# EAGLE board Xonik Waveshaper v1.0 w gp panelized (EAGLE 6.5.0), part 1 of 2
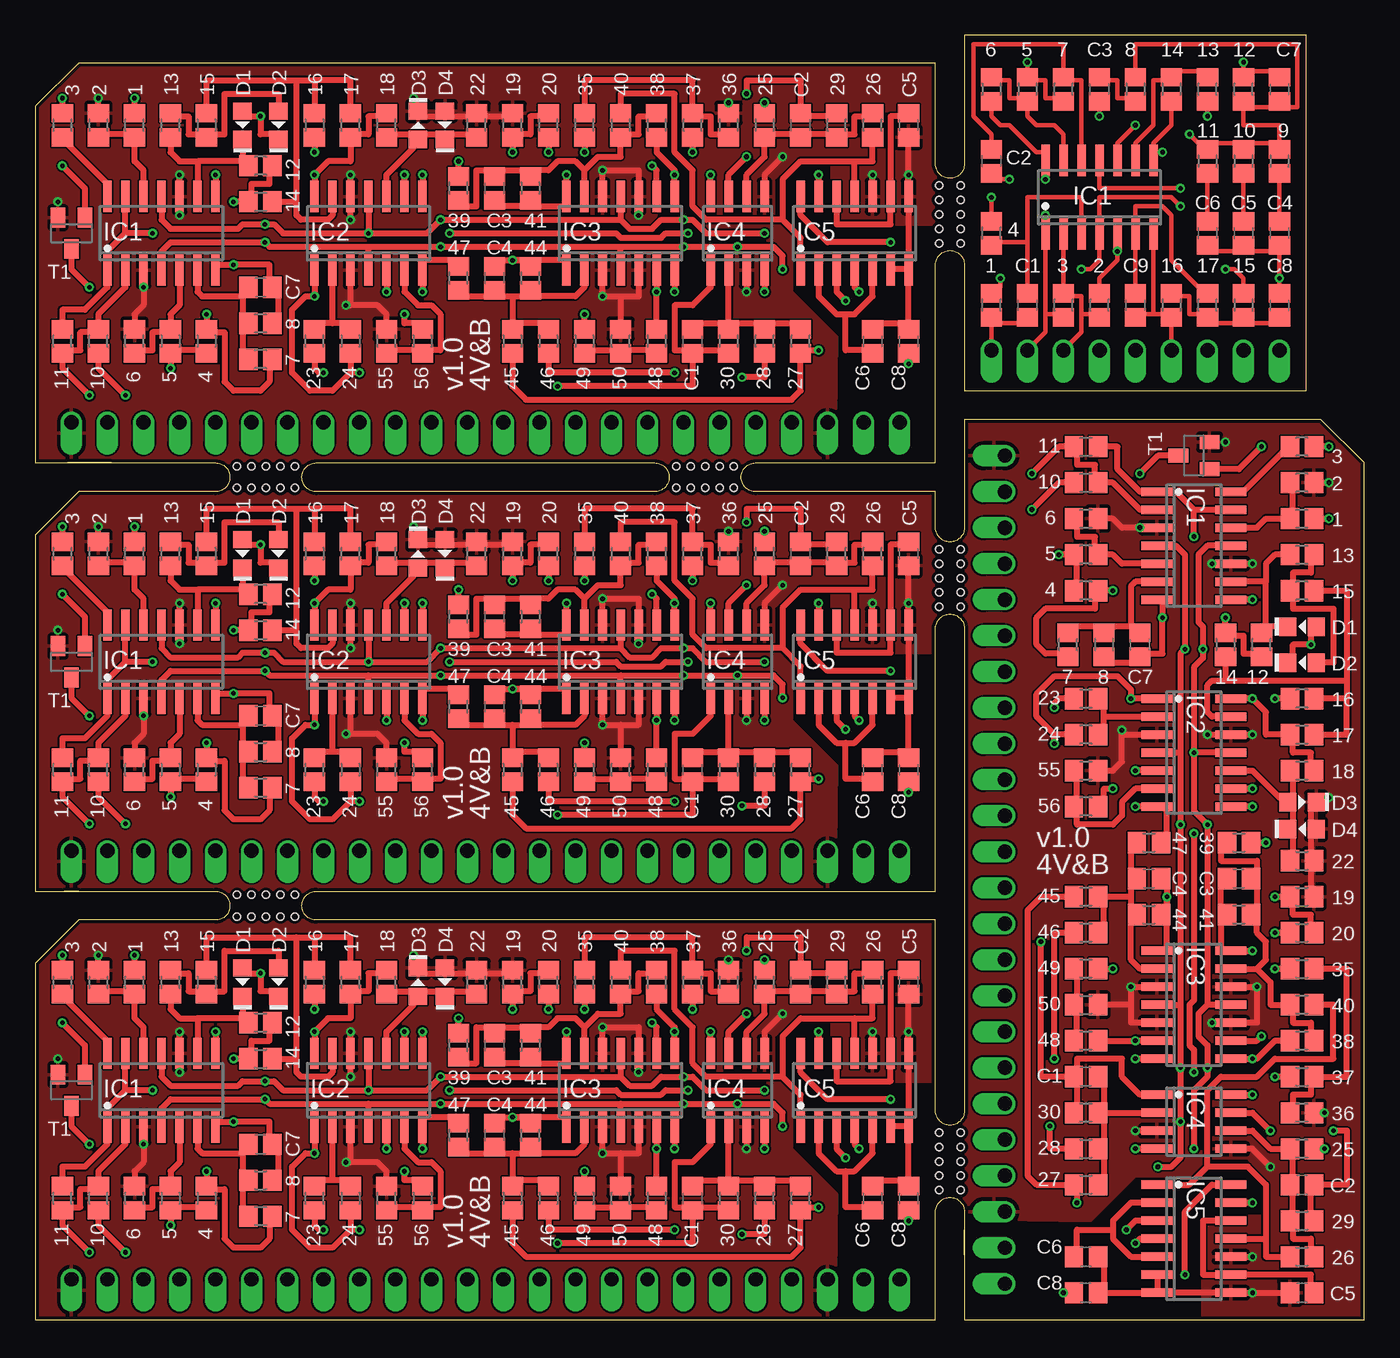
[diagram p0: board, top side]
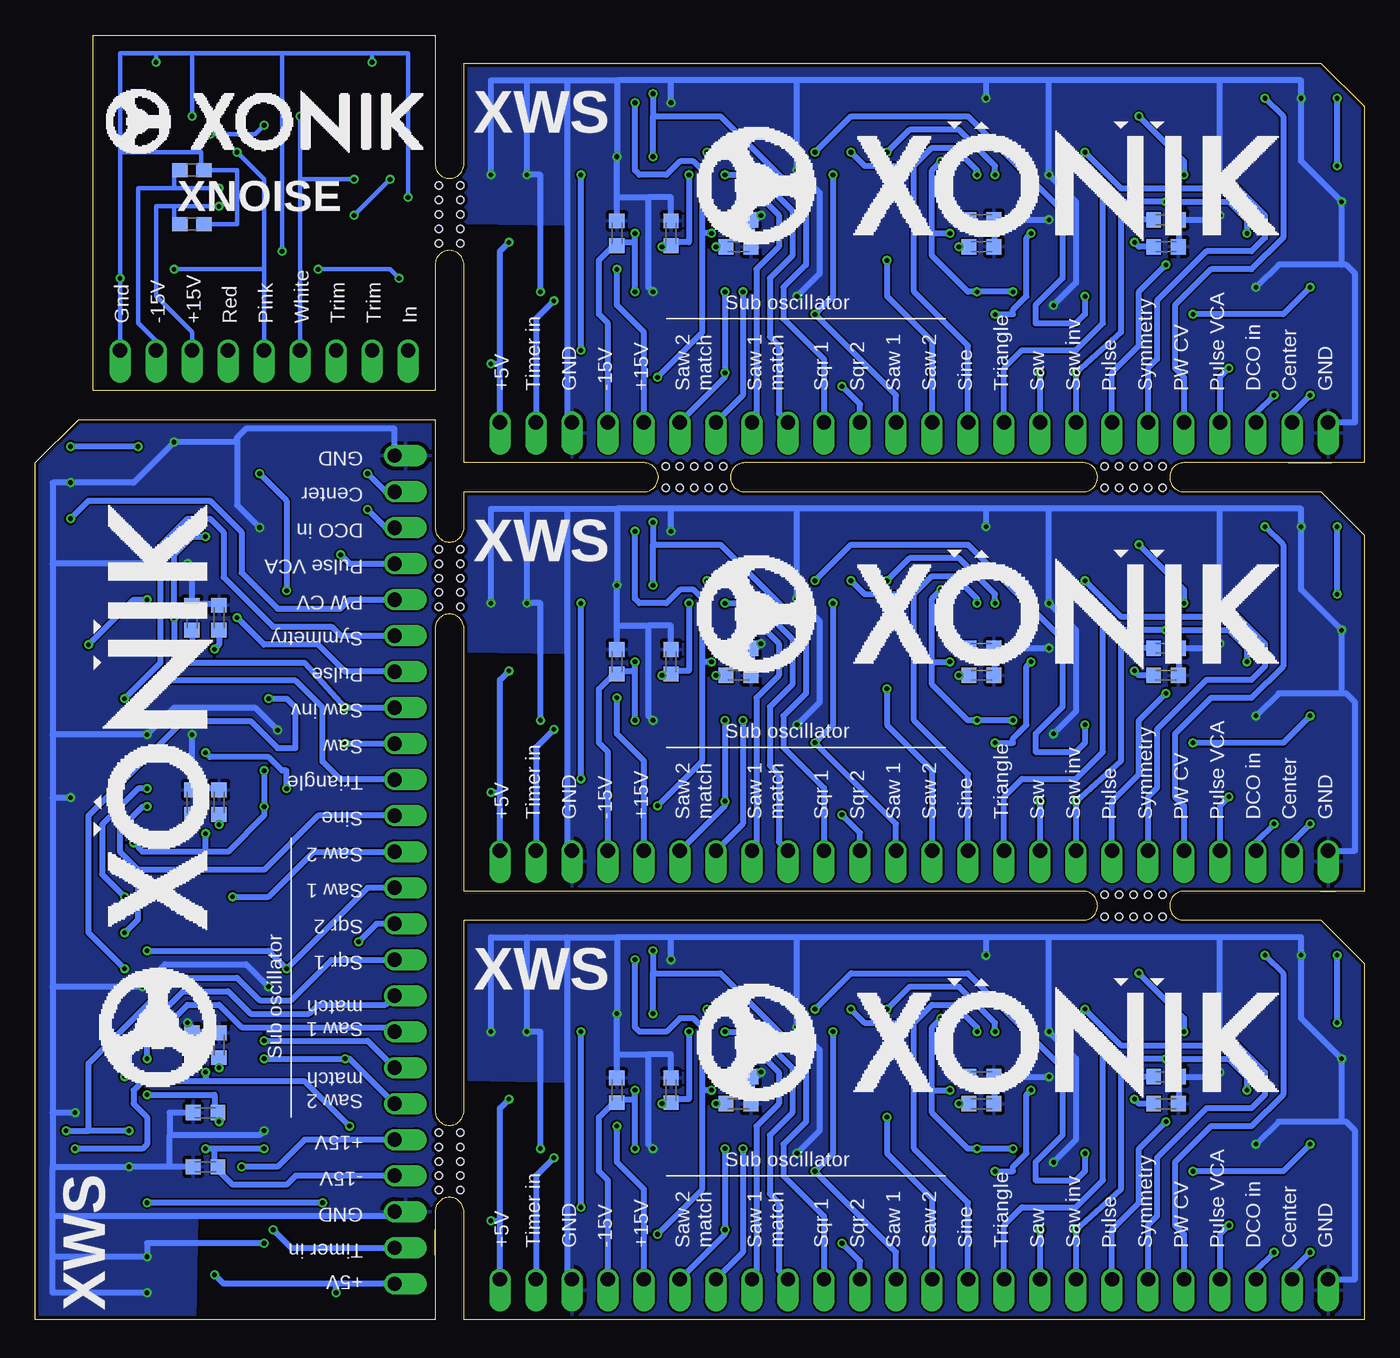
[diagram p1: board, bottom side, seen from below]

Size 93.73 x 90.6 mm. Coordinates in mm from the lower left corner, seen from the top.
Outline: 3.05,30.23 2.03,30.23
Outline: 5.33,60.45 2.29,60.45
Outline: 65.53,4.57 65.53,6.35
Outline: 0,0 63.5,0 63.5,7.62 arc-180 65.53,7.62 65.53,0 93.73,0 93.73,60.45 90.68,63.5 65.53,63.5 65.53,55.88 arc-180 63.5,55.88 63.5,58.42 50.8,58.42 arc-180 50.8,60.45 63.5,60.45 63.5,74.42 arc-180 65.53,74.42 65.53,65.53 89.64,65.53 89.64,90.6 65.53,90.6 65.53,81.53 arc-180 63.5,81.53 63.5,88.65 3.05,88.65 0,85.6 0,60.45 12.7,60.45 arc-180 12.7,58.42 3.05,58.42 0,55.37 0,30.23 12.7,30.23 arc-180 12.7,28.19 3.05,28.19 0,25.15 0,0
Outline: 63.5,14.73 63.5,28.19 19.81,28.19 arc-180 19.81,30.23 63.5,30.23 63.5,48.77 arc-180 65.53,48.77 65.53,14.73 arc-180 63.5,14.73
Outline: 43.69,58.42 19.81,58.42 arc-180 19.81,60.45 43.69,60.45 arc-180 43.69,58.42
Copper layers (1*16): Top 0.035mm / dielectric 1.5mm / Bottom 0.035mm
Design rules "dirt_cheap_dirty_boards.v1": minimum track width 5mil, minimum drill 12mil, track to track 5mil, track to pad 5mil, pad to pad 5mil, via to via 5mil, smd to smd 0mil, copper to edge 10mil, drill to drill 10mil, minimum pad ring 10mil, minimum via ring 6mil, stop-mask expansion 2mil, vias tented up to drill 25mil, thermal gap 10mil
Holes 0.5 mm at 14.22,60.2 15.24,60.2 16.26,60.2 17.27,60.2 18.29,60.2 18.29,58.67 17.27,58.67 16.26,58.67 15.24,58.67 14.22,58.67 45.21,60.2 46.23,60.2 47.24,60.2 48.26,60.2 49.28,60.2 49.28,58.67 48.26,58.67 47.24,58.67 46.23,58.67 45.21,58.67 63.75,50.29 63.75,51.31 63.75,52.32 63.75,53.34 63.75,54.36 65.28,54.36 65.28,53.34 65.28,52.32 65.28,51.31 65.28,50.29 14.22,29.97 15.24,29.97 16.26,29.97 17.27,29.97 18.29,29.97 18.29,28.45 17.27,28.45 16.26,28.45 15.24,28.45 14.22,28.45 63.75,9.14 63.75,10.16 63.75,11.18 63.75,12.19 63.75,13.21 65.28,13.21 65.28,12.19 65.28,11.18 65.28,10.16 65.28,9.14 63.75,75.95 63.75,76.96 63.75,77.98 63.75,78.99 63.75,80.01 65.28,80.01 65.28,78.99 65.28,77.98 65.28,76.96 65.28,75.95

## Footprints (pad centres in the part's own frame; a part is rotated, then mirrored left to right if it is on the bottom)
R0805 = smd 1.3 x 1.5: 1 -0.85,0; 2 0.85,0
SIP-PIN01-1J = drill 1.016 offset: 1 0,0
C0805 = smd 1.3 x 1.5: 1 -0.85,0; 2 0.85,0
C0603K = smd 1.05 x 1.08: 1 -0.875,0; 2 0.875,0
C0603 = smd 1.1 x 1: 1 -0.85,0; 2 0.85,0
D0805-J = smd 1.2 x 1.3: A -1,0; C 1,0
SO14 = smd 0.6 x 2.2: 1 -3.81,-2.6; 2 -2.54,-2.6; 3 -1.27,-2.6; 4 0,-2.6; 5 1.27,-2.6; 6 2.54,-2.6; 7 3.81,-2.6; 8 3.81,2.6; 9 2.54,2.6; 10 1.27,2.6; 11 0,2.6; 12 -1.27,2.6; 13 -2.54,2.6; 14 -3.81,2.6
SO08J = smd 0.6 x 2.2: 1 -1.905,-2.6; 2 -0.635,-2.6; 3 0.635,-2.6; 4 1.905,-2.6; 5 1.905,2.6; 6 0.635,2.6; 7 -0.635,2.6; 8 -1.905,2.6
SO14J = smd 0.6 x 2.2: 1 -3.81,-2.6; 2 -2.54,-2.6; 3 -1.27,-2.6; 4 0,-2.6; 5 1.27,-2.6; 6 2.54,-2.6; 7 3.81,-2.6; 8 3.81,2.6; 9 2.54,2.6; 10 1.27,2.6; 11 0,2.6; 12 -1.27,2.6; 13 -2.54,2.6; 14 -3.81,2.6
SOT23-BEC = smd 1 x 1.4: B -0.95,-1.1; C 0,1.1; E 0.95,-1.1

## Placement (x,y rotation side)
1  10k  [R0805]  6.99,23.81 90 top
2  82k  [R0805]  4.45,23.81 270 top
3  68k  [R0805]  1.91,23.81 270 top
4  1k  [R0805]  12.06,8.57 270 top
5  20k  [R0805]  9.53,8.57 270 top
6  10k  [R0805]  6.99,8.57 90 top
7  10k  [R0805]  15.88,7.3 180 top
8  20k  [R0805]  15.88,9.84 0 top
9  10k  [R0805]  6.99,54.04 90 top
10  27k  [R0805]  4.45,8.57 90 top
11  27k  [R0805]  1.91,8.57 90 top
12  100k  [R0805]  15.88,20.95 180 top
13  100k  [R0805]  9.53,23.81 90 top
14  100k  [R0805]  15.88,18.41 0 top
15  50k  [R0805]  12.06,23.81 270 top
16  150k  [R0805]  19.68,23.81 270 top
17  200k  [R0805]  22.23,23.81 90 top
18  150k  [R0805]  24.77,23.81 90 top
19  1k5  [R0805]  33.66,23.81 90 top
20  15k  [R0805]  36.2,23.81 90 top
21  82k  [R0805]  4.45,54.04 270 top
22  22k  [R0805]  31.11,23.81 90 top
23  100k  [R0805]  19.68,8.57 90 top
24  100k  [R0805]  22.23,8.57 270 top
25  10k  [R0805]  51.44,23.81 270 top
26  10k  [R0805]  59.05,23.81 90 top
27  10k  [R0805]  53.98,8.57 90 top
28  10k  [R0805]  51.44,8.57 90 top
29  20k  [R0805]  56.52,23.81 90 top
30  20k  [R0805]  48.9,8.57 270 top
31  68k  [R0805]  1.91,54.04 270 top
32  1k  [R0805]  12.06,38.8 270 top
33  20k  [R0805]  9.53,38.8 270 top
34  10k  [R0805]  6.99,38.8 90 top
35  27k  [R0805]  38.73,23.81 90 top
36  27k  [R0805]  48.9,23.81 270 top
37  27k  [R0805]  46.35,23.81 90 top
38  47k  [R0805]  43.81,23.81 270 top
39  47k  [R0805]  29.84,19.37 90 top
40  47k  [R0805]  41.27,23.81 270 top
41  47k  [R0805]  34.92,19.37 270 top
42  10k  [R0805]  15.88,37.53 180 top
43  20k  [R0805]  15.88,40.07 0 top
44  47k  [R0805]  34.92,13.02 90 top
45  47k  [R0805]  33.66,8.57 270 top
46  47k  [R0805]  36.2,8.57 270 top
47  47k  [R0805]  29.84,13.02 90 top
48  27k  [R0805]  43.81,8.57 270 top
49  27k  [R0805]  38.73,8.57 270 top
50  27k  [R0805]  41.27,8.57 90 top
51  27k  [R0805]  4.45,38.8 90 top
52  27k  [R0805]  1.91,38.8 90 top
53  100k  [R0805]  15.88,51.18 180 top
54  100k  [R0805]  9.53,54.04 90 top
55  20k  [R0805]  24.77,8.57 90 top
56  100k  [R0805]  27.3,8.57 270 top
57  100k  [R0805]  15.88,48.64 0 top
58  50k  [R0805]  12.06,54.04 270 top
59  150k  [R0805]  19.68,54.04 270 top
60  200k  [R0805]  22.23,54.04 90 top
61  150k  [R0805]  24.77,54.04 90 top
62  1k5  [R0805]  33.66,54.04 90 top
63  15k  [R0805]  36.2,54.04 90 top
64  22k  [R0805]  31.11,54.04 90 top
65  100k  [R0805]  19.68,38.8 90 top
66  100k  [R0805]  22.23,38.8 270 top
67  10k  [R0805]  51.44,54.04 270 top
68  10k  [R0805]  59.05,54.04 90 top
69  10k  [R0805]  53.98,38.8 90 top
70  10k  [R0805]  51.44,38.8 90 top
71  20k  [R0805]  56.52,54.04 90 top
72  20k  [R0805]  48.9,38.8 270 top
73  27k  [R0805]  38.73,54.04 90 top
74  27k  [R0805]  48.9,54.04 270 top
75  27k  [R0805]  46.35,54.04 90 top
76  47k  [R0805]  43.81,54.04 270 top
77  47k  [R0805]  29.84,49.59 90 top
78  47k  [R0805]  41.27,54.04 270 top
79  47k  [R0805]  34.92,49.59 270 top
80  47k  [R0805]  34.92,43.24 90 top
81  47k  [R0805]  33.66,38.8 270 top
82  47k  [R0805]  36.2,38.8 270 top
83  47k  [R0805]  29.84,43.24 90 top
84  27k  [R0805]  43.81,38.8 270 top
85  27k  [R0805]  38.73,38.8 270 top
86  27k  [R0805]  41.27,38.8 90 top
87  20k  [R0805]  24.77,38.8 90 top
88  100k  [R0805]  27.3,38.8 270 top
89  10k  [R0805]  6.99,84.26 90 top
90  82k  [R0805]  4.45,84.26 270 top
91  68k  [R0805]  1.91,84.26 270 top
92  1k  [R0805]  12.06,69.02 270 top
93  20k  [R0805]  9.53,69.02 270 top
94  10k  [R0805]  6.99,69.02 90 top
95  10k  [R0805]  15.88,67.75 180 top
96  20k  [R0805]  15.88,70.29 0 top
97  27k  [R0805]  4.45,69.02 90 top
98  27k  [R0805]  1.91,69.02 90 top
99  100k  [R0805]  15.88,81.41 180 top
100  100k  [R0805]  9.53,84.26 90 top
101  100k  [R0805]  15.88,78.87 0 top
102  50k  [R0805]  12.06,84.26 270 top
103  150k  [R0805]  19.68,84.26 270 top
104  200k  [R0805]  22.23,84.26 90 top
105  150k  [R0805]  24.77,84.26 90 top
106  1k5  [R0805]  33.66,84.26 90 top
107  15k  [R0805]  36.2,84.26 90 top
108  22k  [R0805]  31.11,84.26 90 top
109  100k  [R0805]  19.68,69.02 90 top
110  100k  [R0805]  22.23,69.02 270 top
111  10k  [R0805]  51.44,84.26 270 top
112  10k  [R0805]  59.05,84.26 90 top
113  10k  [R0805]  53.98,69.02 90 top
114  10k  [R0805]  51.44,69.02 90 top
115  20k  [R0805]  56.52,84.26 90 top
116  20k  [R0805]  48.9,69.02 270 top
117  27k  [R0805]  38.73,84.26 90 top
118  27k  [R0805]  48.9,84.26 270 top
119  27k  [R0805]  46.35,84.26 90 top
120  47k  [R0805]  43.81,84.26 270 top
121  47k  [R0805]  29.84,79.82 90 top
122  47k  [R0805]  41.27,84.26 270 top
123  47k  [R0805]  34.92,79.82 270 top
124  47k  [R0805]  34.92,73.47 90 top
125  47k  [R0805]  33.66,69.02 270 top
126  47k  [R0805]  36.2,69.02 270 top
127  47k  [R0805]  29.84,73.47 90 top
128  27k  [R0805]  43.81,69.02 270 top
129  27k  [R0805]  38.73,69.02 270 top
130  27k  [R0805]  41.27,69.02 90 top
131  20k  [R0805]  24.77,69.02 90 top
132  100k  [R0805]  27.3,69.02 270 top
133  10k  [R0805]  89.34,56.52 0 top
134  82k  [R0805]  89.34,59.05 180 top
135  68k  [R0805]  89.34,61.59 180 top
136  1k  [R0805]  74.1,51.44 180 top
137  20k  [R0805]  74.1,53.98 180 top
138  10k  [R0805]  74.1,56.52 0 top
139  10k  [R0805]  72.83,47.62 90 top
140  20k  [R0805]  75.37,47.62 270 top
141  27k  [R0805]  74.1,59.05 0 top
142  27k  [R0805]  74.1,61.59 0 top
143  100k  [R0805]  86.49,47.62 90 top
144  100k  [R0805]  89.34,53.98 0 top
145  100k  [R0805]  83.95,47.62 270 top
146  50k  [R0805]  89.34,51.44 180 top
147  150k  [R0805]  89.34,43.81 180 top
148  200k  [R0805]  89.34,41.27 0 top
149  150k  [R0805]  89.34,38.73 0 top
150  1k5  [R0805]  89.34,29.84 0 top
151  15k  [R0805]  89.34,27.3 0 top
152  22k  [R0805]  89.34,32.38 0 top
153  100k  [R0805]  74.1,43.81 0 top
154  100k  [R0805]  74.1,41.27 180 top
155  10k  [R0805]  89.34,12.06 180 top
156  10k  [R0805]  89.34,4.45 0 top
157  10k  [R0805]  74.1,9.53 0 top
158  10k  [R0805]  74.1,12.06 0 top
159  20k  [R0805]  89.34,6.99 0 top
160  20k  [R0805]  74.1,14.61 180 top
161  27k  [R0805]  89.34,24.77 0 top
162  27k  [R0805]  89.34,14.61 180 top
163  27k  [R0805]  89.34,17.14 0 top
164  47k  [R0805]  89.34,19.68 180 top
165  47k  [R0805]  84.9,33.66 0 top
166  47k  [R0805]  89.34,22.23 180 top
167  47k  [R0805]  84.9,28.57 180 top
168  47k  [R0805]  78.55,28.57 0 top
169  47k  [R0805]  74.1,29.84 180 top
170  47k  [R0805]  74.1,27.3 180 top
171  47k  [R0805]  78.55,33.66 0 top
172  27k  [R0805]  74.1,19.68 180 top
173  27k  [R0805]  74.1,24.77 180 top
174  27k  [R0805]  74.1,22.23 0 top
175  20k  [R0805]  74.1,38.73 0 top
176  100k  [R0805]  74.1,36.2 180 top
177  220k  [R0805]  67.44,71.56 90 top
178  1k  [R0805]  75.06,71.56 90 top
179  20k  [R0805]  72.52,71.56 90 top
180  100k  [R0805]  67.44,76.64 90 top
181  1k  [R0805]  69.98,86.8 270 top
182  20k  [R0805]  67.44,86.8 270 top
183  100k  [R0805]  72.52,86.8 90 top
184  68k  [R0805]  77.6,86.8 270 top
185  33.2k  [R0805]  87.76,81.72 270 top
186  10k  [R0805]  85.22,81.72 270 top
187  3k  [R0805]  82.68,81.72 270 top
188  1M  [R0805]  85.22,86.8 90 top
189  1k  [R0805]  82.68,86.8 90 top
190  20k  [R0805]  80.14,86.8 270 top
191  4k7  [R0805]  85.22,71.56 270 top
192  15k  [R0805]  80.14,71.56 270 top
193  301k  [R0805]  82.68,71.56 90 top
+5V  [SIP-PIN01-1J]  60.96,2.86 0 top
+5V1  [SIP-PIN01-1J]  60.96,33.08 0 top
+5V2  [SIP-PIN01-1J]  60.96,63.31 0 top
+5V3  [SIP-PIN01-1J]  68.39,2.54 270 top
+15V  [SIP-PIN01-1J]  50.8,2.86 0 top
+15V1  [SIP-PIN01-1J]  50.8,33.08 0 top
+15V2  [SIP-PIN01-1J]  50.8,63.31 0 top
+15V3  [SIP-PIN01-1J]  68.39,12.7 270 top
+15V4  [SIP-PIN01-1J]  82.68,68.39 0 top
-15V  [SIP-PIN01-1J]  53.34,2.86 0 top
-15V1  [SIP-PIN01-1J]  53.34,33.08 0 top
-15V2  [SIP-PIN01-1J]  53.34,63.31 0 top
-15V3  [SIP-PIN01-1J]  68.39,10.16 270 top
-15V4  [SIP-PIN01-1J]  85.22,68.39 0 top
C1  10pF  [C0805]  46.35,8.57 270 top
C2  10pF  [C0805]  53.98,23.81 90 top
C3  ?pF  [C0805]  32.38,19.37 270 top
C4  ?pF  [C0805]  32.38,13.02 90 top
C5  100nF  [C0805]  61.59,23.81 90 top
C6  100nF  [C0805]  59.05,8.57 270 top
C7  5pF  [C0805]  15.88,12.38 0 top
C8  100nF  [C0805]  61.59,8.57 270 top
C9  100nF  [C0603K]  44.13,15.24 180 bottom
C10  100nF  [C0603K]  26.99,15.24 180 bottom
C11  100nF  [C0603K]  13.97,15.24 180 bottom
C12  100nF  [C0603K]  52.7,16.19 90 bottom
C13  100nF  [C0603K]  44.13,17.14 0 bottom
C14  100nF  [C0603K]  26.99,17.14 0 bottom
C15  100nF  [C0603K]  13.97,17.14 0 bottom
C16  100nF  [C0603K]  48.9,16.19 270 bottom
C17  10pF  [C0805]  46.35,38.8 270 top
C18  10pF  [C0805]  53.98,54.04 90 top
C19  ?pF  [C0805]  32.38,49.59 270 top
C20  ?pF  [C0805]  32.38,43.24 90 top
C21  100nF  [C0805]  61.59,54.04 90 top
C22  100nF  [C0805]  59.05,38.8 270 top
C23  5pF  [C0805]  15.88,42.61 0 top
C24  100nF  [C0603K]  48.9,46.42 270 bottom
C25  100nF  [C0603K]  44.13,45.47 180 bottom
C26  100nF  [C0603K]  26.99,45.47 180 bottom
C27  100nF  [C0603K]  13.97,45.47 180 bottom
C28  100nF  [C0603K]  52.7,46.42 90 bottom
C29  100nF  [C0603K]  44.13,47.37 0 bottom
C30  100nF  [C0603K]  26.99,47.37 0 bottom
C31  100nF  [C0603K]  13.97,47.37 0 bottom
C32  100nF  [C0805]  61.59,38.8 270 top
C33  10pF  [C0805]  46.35,69.02 270 top
C34  10pF  [C0805]  53.98,84.26 90 top
C35  ?pF  [C0805]  32.38,79.82 270 top
C36  ?pF  [C0805]  32.38,73.47 90 top
C37  100nF  [C0805]  61.59,84.26 90 top
C38  100nF  [C0805]  59.05,69.02 270 top
C39  5pF  [C0805]  15.88,72.83 0 top
C40  100nF  [C0603K]  48.9,76.64 270 bottom
C41  100nF  [C0603K]  44.13,75.69 180 bottom
C42  100nF  [C0603K]  26.99,75.69 180 bottom
C43  100nF  [C0603K]  13.97,75.69 180 bottom
C44  100nF  [C0603K]  52.7,76.64 90 bottom
C45  100nF  [C0603K]  44.13,77.6 0 bottom
C46  100nF  [C0603K]  26.99,77.6 0 bottom
C47  100nF  [C0603K]  13.97,77.6 0 bottom
C48  100nF  [C0805]  61.59,69.02 270 top
C49  10pF  [C0805]  74.1,17.14 180 top
C50  10pF  [C0805]  89.34,9.53 0 top
C51  ?pF  [C0805]  84.9,31.11 180 top
C52  ?pF  [C0805]  78.55,31.11 0 top
C53  100nF  [C0805]  89.34,1.91 0 top
C54  100nF  [C0805]  74.1,4.45 180 top
C55  5pF  [C0805]  77.91,47.62 270 top
C56  100nF  [C0603K]  81.72,14.61 0 bottom
C57  100nF  [C0603K]  80.77,19.37 270 bottom
C58  100nF  [C0603K]  80.77,36.51 270 bottom
C59  100nF  [C0603K]  80.77,49.53 270 bottom
C60  100nF  [C0603K]  81.72,10.79 180 bottom
C61  100nF  [C0603K]  82.68,19.37 90 bottom
C62  100nF  [C0603K]  82.68,36.51 90 bottom
C63  100nF  [C0603K]  82.68,49.53 90 bottom
C64  100nF  [C0805]  74.1,1.91 180 top
C65  470n  [C0805]  69.98,71.56 90 top
C66  470n  [C0805]  67.44,81.72 90 top
C67  470n  [C0805]  75.06,86.8 90 top
C68  100n  [C0805]  87.76,76.64 90 top
C69  22n  [C0805]  85.22,76.64 90 top
C70  10n  [C0805]  82.68,76.64 90 top
C71  3n3  [C0805]  87.76,86.8 270 top
C72  220n  [C0805]  87.76,71.56 270 top
C73  2n2  [C0805]  77.6,71.56 90 top
C74  [C0603]  82.68,77.28 180 bottom
C75  [C0603]  82.68,81.09 0 bottom
CENTER  [SIP-PIN01-1J]  5.08,2.86 0 top
CENTER1  [SIP-PIN01-1J]  5.08,33.08 0 top
CENTER2  [SIP-PIN01-1J]  5.08,63.31 0 top
CENTER3  [SIP-PIN01-1J]  68.39,58.42 270 top
D1  1N41480805  [D0805-J]  14.61,23.81 270 top
D2  1N41480805  [D0805-J]  17.14,23.81 270 top
D3  1N41480805  [D0805-J]  26.99,23.81 90 top
D4  1N41480805  [D0805-J]  28.89,23.81 270 top
D5  1N41480805  [D0805-J]  14.61,54.04 270 top
D6  1N41480805  [D0805-J]  17.14,54.04 270 top
D7  1N41480805  [D0805-J]  26.99,54.04 90 top
D8  1N41480805  [D0805-J]  28.89,54.04 270 top
D9  1N41480805  [D0805-J]  14.61,84.26 270 top
D10  1N41480805  [D0805-J]  17.14,84.26 270 top
D11  1N41480805  [D0805-J]  26.99,84.26 90 top
D12  1N41480805  [D0805-J]  28.89,84.26 270 top
D13  1N41480805  [D0805-J]  89.34,48.9 180 top
D14  1N41480805  [D0805-J]  89.34,46.35 180 top
D15  1N41480805  [D0805-J]  89.34,36.51 0 top
D16  1N41480805  [D0805-J]  89.34,34.61 180 top
DCO_IN  [SIP-PIN01-1J]  7.62,2.86 0 top
DCO_IN1  [SIP-PIN01-1J]  7.62,33.08 0 top
DCO_IN2  [SIP-PIN01-1J]  7.62,63.31 0 top
DCO_IN3  [SIP-PIN01-1J]  68.39,55.88 270 top
DCO_TIMER  [SIP-PIN01-1J]  58.42,2.86 0 top
DCO_TIMER1  [SIP-PIN01-1J]  58.42,33.08 0 top
DCO_TIMER2  [SIP-PIN01-1J]  58.42,63.31 0 top
DCO_TIMER3  [SIP-PIN01-1J]  68.39,5.08 270 top
GND  [SIP-PIN01-1J]  55.88,2.86 0 top
GND1  [SIP-PIN01-1J]  55.88,33.08 0 top
GND2  [SIP-PIN01-1J]  2.54,33.08 0 top
GND3  [SIP-PIN01-1J]  55.88,63.31 0 top
GND4  [SIP-PIN01-1J]  2.54,63.31 0 top
GND5  [SIP-PIN01-1J]  68.39,7.62 270 top
GND6  [SIP-PIN01-1J]  68.39,60.96 270 top
GND7  [SIP-PIN01-1J]  87.76,68.39 0 top
GND27  [SIP-PIN01-1J]  2.54,2.86 0 top
IC1  TL074D  [SO14]  8.89,16.19 0 top
IC2  TL074D  [SO14]  23.5,16.19 0 top
IC3  TL074D  [SO14]  41.27,16.19 0 top
IC4  TL072D  [SO08J]  49.53,16.19 0 top
IC5  4013D  [SO14J]  57.78,16.19 0 top
IC6  TL074D  [SO14]  8.89,46.42 0 top
IC7  TL074D  [SO14]  23.5,46.42 0 top
IC8  TL074D  [SO14]  41.27,46.42 0 top
IC9  4013D  [SO14J]  57.78,46.42 0 top
IC10  TL072D  [SO08J]  49.53,46.42 0 top
IC11  TL074D  [SO14]  8.89,76.64 0 top
IC12  TL074D  [SO14]  23.5,76.64 0 top
IC13  TL074D  [SO14]  41.27,76.64 0 top
IC14  4013D  [SO14J]  57.78,76.64 0 top
IC15  TL072D  [SO08J]  49.53,76.64 0 top
IC16  TL074D  [SO14]  81.72,54.61 270 top
IC17  TL074D  [SO14]  81.72,40.01 270 top
IC18  TL074D  [SO14]  81.72,22.23 270 top
IC19  4013D  [SO14J]  81.72,5.71 270 top
IC20  TL072D  [SO08J]  81.72,13.97 270 top
IC21  TL074D  [SO14]  75.06,79.18 0 top
INV_SAW  [SIP-PIN01-1J]  20.32,2.86 0 top
INV_SAW1  [SIP-PIN01-1J]  20.32,33.08 0 top
INV_SAW2  [SIP-PIN01-1J]  20.32,63.31 0 top
INV_SAW3  [SIP-PIN01-1J]  68.39,43.18 270 top
LEVEL1  [SIP-PIN01-1J]  72.52,68.39 0 top
LEVEL2  [SIP-PIN01-1J]  69.98,68.39 0 top
NOISE_IN  [SIP-PIN01-1J]  67.44,68.39 0 top
PINK_OUT  [SIP-PIN01-1J]  77.6,68.39 0 top
PULSE  [SIP-PIN01-1J]  17.78,2.86 0 top
PULSE1  [SIP-PIN01-1J]  17.78,33.08 0 top
PULSE2  [SIP-PIN01-1J]  17.78,63.31 0 top
PULSE3  [SIP-PIN01-1J]  68.39,45.72 270 top
PULSE_AMP_CV  [SIP-PIN01-1J]  10.16,2.86 0 top
PULSE_AMP_CV1  [SIP-PIN01-1J]  10.16,33.08 0 top
PULSE_AMP_CV2  [SIP-PIN01-1J]  10.16,63.31 0 top
PULSE_AMP_CV3  [SIP-PIN01-1J]  68.39,53.34 270 top
PW_CV  [SIP-PIN01-1J]  12.7,2.86 0 top
PW_CV1  [SIP-PIN01-1J]  12.7,33.08 0 top
PW_CV2  [SIP-PIN01-1J]  12.7,63.31 0 top
PW_CV3  [SIP-PIN01-1J]  68.39,50.8 270 top
RED_OUT  [SIP-PIN01-1J]  80.14,68.39 0 top
SAW  [SIP-PIN01-1J]  22.86,2.86 0 top
SAW1  [SIP-PIN01-1J]  22.86,33.08 0 top
SAW2  [SIP-PIN01-1J]  22.86,63.31 0 top
SAW3  [SIP-PIN01-1J]  68.39,40.64 270 top
SINE  [SIP-PIN01-1J]  27.94,2.86 0 top
SINE1  [SIP-PIN01-1J]  27.94,33.08 0 top
SINE2  [SIP-PIN01-1J]  27.94,63.31 0 top
SINE3  [SIP-PIN01-1J]  68.39,35.56 270 top
ST1  [SIP-PIN01-1J]  40.64,2.86 0 top
ST2  [SIP-PIN01-1J]  43.18,2.86 0 top
ST3  [SIP-PIN01-1J]  45.72,2.86 0 top
ST4  [SIP-PIN01-1J]  48.26,2.86 0 top
ST5  [SIP-PIN01-1J]  40.64,33.08 0 top
ST6  [SIP-PIN01-1J]  43.18,33.08 0 top
ST7  [SIP-PIN01-1J]  45.72,33.08 0 top
ST8  [SIP-PIN01-1J]  48.26,33.08 0 top
ST9  [SIP-PIN01-1J]  40.64,63.31 0 top
ST10  [SIP-PIN01-1J]  43.18,63.31 0 top
ST11  [SIP-PIN01-1J]  45.72,63.31 0 top
ST12  [SIP-PIN01-1J]  48.26,63.31 0 top
ST13  [SIP-PIN01-1J]  68.39,22.86 270 top
ST14  [SIP-PIN01-1J]  68.39,20.32 270 top
ST15  [SIP-PIN01-1J]  68.39,17.78 270 top
ST16  [SIP-PIN01-1J]  68.39,15.24 270 top
SUB_SAW_1  [SIP-PIN01-1J]  33.02,2.86 0 top
SUB_SAW_2  [SIP-PIN01-1J]  30.48,2.86 0 top
SUB_SAW_3  [SIP-PIN01-1J]  33.02,33.08 0 top
SUB_SAW_4  [SIP-PIN01-1J]  30.48,33.08 0 top
SUB_SAW_5  [SIP-PIN01-1J]  33.02,63.31 0 top
SUB_SAW_6  [SIP-PIN01-1J]  30.48,63.31 0 top
SUB_SAW_7  [SIP-PIN01-1J]  68.39,30.48 270 top
SUB_SAW_8  [SIP-PIN01-1J]  68.39,33.02 270 top
SUB_SQR_1  [SIP-PIN01-1J]  38.1,2.86 0 top
SUB_SQR_2  [SIP-PIN01-1J]  35.56,2.86 0 top
SUB_SQR_3  [SIP-PIN01-1J]  38.1,33.08 0 top
SUB_SQR_4  [SIP-PIN01-1J]  35.56,33.08 0 top
SUB_SQR_5  [SIP-PIN01-1J]  38.1,63.31 0 top
SUB_SQR_6  [SIP-PIN01-1J]  35.56,63.31 0 top
SUB_SQR_7  [SIP-PIN01-1J]  68.39,25.4 270 top
SUB_SQR_8  [SIP-PIN01-1J]  68.39,27.94 270 top
SYMMETRY  [SIP-PIN01-1J]  15.24,2.86 0 top
SYMMETRY1  [SIP-PIN01-1J]  15.24,33.08 0 top
SYMMETRY2  [SIP-PIN01-1J]  15.24,63.31 0 top
SYMMETRY3  [SIP-PIN01-1J]  68.39,48.26 270 top
T1  2n3904  [SOT23-BEC]  2.54,16.19 180 top
T2  2n3904  [SOT23-BEC]  2.54,46.42 180 top
T3  2n3904  [SOT23-BEC]  2.54,76.64 180 top
T4  2n3904  [SOT23-BEC]  81.72,60.96 90 top
TRIANGLE  [SIP-PIN01-1J]  25.4,2.86 0 top
TRIANGLE1  [SIP-PIN01-1J]  25.4,33.08 0 top
TRIANGLE2  [SIP-PIN01-1J]  25.4,63.31 0 top
TRIANGLE3  [SIP-PIN01-1J]  68.39,38.1 270 top
WHITE_OUT  [SIP-PIN01-1J]  75.06,68.39 0 top

## Library data of the parts
1-193 C1-C75 = resistor
+5V +5V1-+5V3 +15V +15V1-+15V4 -15V -15V1--15V4 CENTER CENTER1-CENTER3 D1-D16 DCO_IN DCO_IN1-DCO_IN3 DCO_TIMER DCO_TIMER1-DCO_TIMER3 GND GND1-GND7 GND27 IC4 IC5 IC9 IC10 IC14 IC15 IC19 IC20 INV_SAW INV_SAW1-INV_SAW3 LEVEL1 LEVEL2 NOISE_IN PINK_OUT PULSE PULSE1-PULSE3 PULSE_AMP_CV PULSE_AMP_CV1-PULSE_AMP_CV3 PW_CV PW_CV1-PW_CV3 RED_OUT SAW SAW1-SAW3 SINE SINE1-SINE3 ST1-ST16 SUB_SAW_1-SUB_SAW_8 SUB_SQR_1-SUB_SQR_8 SYMMETRY SYMMETRY1-SYMMETRY3 TRIANGLE TRIANGLE1-TRIANGLE3 WHITE_OUT = joakim
IC1-IC3 IC6-IC8 IC11-IC13 IC16-IC18 IC21 = linear
T1-T4 = transistor-neu-to92

## Nets
+5V: +5V.1 C8.2 IC5.14
+5V1: +5V1.1 C32.2 IC9.14
+5V2: +5V2.1 C48.2 IC14.14
+5V3: +5V3.1 C64.2 IC19.14
+15V: +15V.1 C9.2 C10.2 C11.2 C16.2 IC1.4 IC2.4 IC3.4 IC4.8
+15V1: +15V1.1 C24.2 C25.2 C26.2 C27.2 IC6.4 IC7.4 IC8.4 IC10.8
+15V2: +15V2.1 C40.2 C41.2 C42.2 C43.2 IC11.4 IC12.4 IC13.4 IC15.8
+15V3: +15V3.1 C56.2 C57.2 C58.2 C59.2 IC16.4 IC17.4 IC18.4 IC20.8
+15V4: 177.2 +15V4.1 C74.2 IC21.4
-2.5V: 25.1 28.1 39.2 47.2 IC2.5 IC2.7
-2.5V1: 67.1 70.1 77.2 83.2 IC7.5 IC7.7
-2.5V2: 111.1 114.1 121.2 127.2 IC12.5 IC12.7
-2.5V3: 155.1 158.1 165.2 171.2 IC17.5 IC17.7
-15V: 56.1 -15V.1 C12.1 C13.1 C14.1 C15.1 IC1.11 IC2.11 IC3.11 IC4.4
-15V1: 88.1 -15V1.1 C28.1 C29.1 C30.1 C31.1 IC6.11 IC7.11 IC8.11 IC10.4
-15V2: 132.1 -15V2.1 C44.1 C45.1 C46.1 C47.1 IC11.11 IC12.11 IC13.11 IC15.4
-15V3: 176.1 -15V3.1 C60.1 C61.1 C62.1 C63.1 IC16.11 IC17.11 IC18.11 IC20.4
-15V4: -15V4.1 C75.1 IC21.11
AMP_CV: 4.2 5.2 PULSE_AMP_CV.1
AMP_CV1: 32.2 33.2 PULSE_AMP_CV1.1
AMP_CV2: 92.2 93.2 PULSE_AMP_CV2.1
AMP_CV3: 136.2 137.2 PULSE_AMP_CV3.1
DCO_IN: 10.1 DCO_IN.1
DCO_IN1: 51.1 DCO_IN1.1
DCO_IN2: 97.1 DCO_IN2.1
DCO_IN3: 141.1 DCO_IN3.1
GND: 2.1 6.2 19.2 22.2 36.1 50.2 55.2 C5.1 C6.1 C8.1 C9.1 C10.1 C11.1 C12.2 C13.2 C14.2 C15.2 C16.1 D3.C D4.A GND27.1 GND.1 IC1.3 IC1.10 IC2.3 IC2.12 IC3.3 IC3.5 IC3.10 IC3.12 IC4.3 IC4.5 IC5.4 IC5.6 IC5.7 IC5.8 IC5.10 T1.E
GND1: 21.1 34.2 62.2 64.2 74.1 86.2 87.2 C21.1 C22.1 C24.1 C25.1 C26.1 C27.1 C28.2 C29.2 C30.2 C31.2 C32.1 D7.C D8.A GND1.1 GND2.1 IC6.3 IC6.10 IC7.3 IC7.12 IC8.3 IC8.5 IC8.10 IC8.12 IC9.4 IC9.6 IC9.7 IC9.8 IC9.10 IC10.3 IC10.5 T2.E
GND2: 90.1 94.2 106.2 108.2 118.1 130.2 131.2 C37.1 C38.1 C40.1 C41.1 C42.1 C43.1 C44.2 C45.2 C46.2 C47.2 C48.1 D11.C D12.A GND3.1 GND4.1 IC11.3 IC11.10 IC12.3 IC12.12 IC13.3 IC13.5 IC13.10 IC13.12 IC14.4 IC14.6 IC14.7 IC14.8 IC14.10 IC15.3 IC15.5 T3.E
GND3: 134.1 138.2 150.2 152.2 162.1 174.2 175.2 C53.1 C54.1 C56.1 C57.1 C58.1 C59.1 C60.2 C61.2 C62.2 C63.2 C64.1 D15.C D16.A GND5.1 GND6.1 IC16.3 IC16.10 IC17.3 IC17.12 IC18.3 IC18.5 IC18.10 IC18.12 IC19.4 IC19.6 IC19.7 IC19.8 IC19.10 IC20.3 IC20.5 T4.E
GND4: 178.2 180.2 181.1 183.1 188.2 189.1 C68.1 C69.1 C70.1 C71.1 C72.1 C74.1 C75.2 GND7.1 IC21.5
N$1: 1.1 2.2 IC1.12
N$2: 3.2 IC1.14
N$3: 3.1 T1.B
N$4: 4.1 7.1 T1.C
N$5: 5.1 6.1 IC1.5
N$6: 7.2 8.1 C7.1 IC1.6
N$7: 8.2 C7.2 IC1.7 PULSE.1
N$8: 9.1 21.2 IC6.12
N$9: 11.2 12.1 14.1 23.1 IC1.1 IC1.13 INV_SAW.1
N$10: 10.2 11.1 CENTER.1 IC1.2
N$11: 12.2 13.1 D1.C IC1.9
N$12: D1.A D2.C IC1.8
N$13: 13.2 15.2 D2.A
N$14: 14.2 15.1 16.1 17.2 IC2.13
N$15: 23.2 24.1 IC2.2
N$16: 24.2 35.1 IC2.1 SAW.1
N$17: 29.2 C2.2 IC4.7 SUB_SQR_1.1
N$18: 30.2 C1.2 IC4.1 SUB_SQR_2.1
N$19: 25.2 26.2 29.1 C2.1 IC4.6
N$20: 46.2 IC3.7 ST4.1
N$21: 48.2 49.2 50.1
N$22: 27.2 28.2 30.1 C1.1 IC4.2
N$23: 35.2 36.2 37.2
N$24: 37.1 IC3.9 ST1.1
N$25: 31.2 IC6.14
N$26: 38.1 39.1 40.2 41.1 C3.1 IC3.13
N$27: 41.2 49.1 C3.2 IC3.14 SUB_SAW_1.1
N$28: 48.1 IC3.6 ST3.1
N$29: 44.1 45.1 46.1 47.1 C4.1 IC3.2
N$30: 44.2 C4.2 IC3.1 SUB_SAW_2.1
N$31: C6.2 IC5.2 IC5.5
N$32: 26.1 40.1 IC5.1 IC5.11
N$33: 55.1 56.2 IC2.6
N$34: C5.2 IC5.9 IC5.12
N$35: 27.1 45.2 IC5.13
N$36: 19.1 20.2 IC2.9
N$37: 16.2 SYMMETRY.1
N$38: 17.1 18.2 IC2.14 TRIANGLE.1
N$39: 18.1 22.1 D3.A D4.C IC2.10
N$40: 20.1 IC2.8 SINE.1
N$41: 38.2 IC3.8 ST2.1
N$42: 31.1 T2.B
N$43: 32.1 42.1 T2.C
N$44: 33.1 34.1 IC6.5
N$45: 42.2 43.1 C23.1 IC6.6
N$46: 43.2 C23.2 IC6.7 PULSE1.1
N$47: 52.2 53.1 57.1 65.1 IC6.1 IC6.13 INV_SAW1.1
N$48: 51.2 52.1 CENTER1.1 IC6.2
N$49: 53.2 54.1 D5.C IC6.9
N$50: D5.A D6.C IC6.8
N$51: 54.2 58.2 D6.A
N$52: 57.2 58.1 59.1 60.2 IC7.13
N$53: 65.2 66.1 IC7.2
N$54: 66.2 73.1 IC7.1 SAW1.1
N$55: 71.2 C18.2 IC10.7 SUB_SQR_3.1
N$56: 72.2 C17.2 IC10.1 SUB_SQR_4.1
N$57: 67.2 68.2 71.1 C18.1 IC10.6
N$58: 69.2 70.2 72.1 C17.1 IC10.2
N$59: 73.2 74.2 75.2
N$60: 75.1 IC8.9 ST5.1
N$61: 76.1 77.1 78.2 79.1 C19.1 IC8.13
N$62: 79.2 85.1 C19.2 IC8.14 SUB_SAW_3.1
N$63: 82.2 IC8.7 ST8.1
N$64: 84.2 85.2 86.1
N$65: 84.1 IC8.6 ST7.1
N$66: 80.1 81.1 82.1 83.1 C20.1 IC8.2
N$67: 80.2 C20.2 IC8.1 SUB_SAW_4.1
N$68: 87.1 88.2 IC7.6
N$69: C22.2 IC9.2 IC9.5
N$70: 68.1 78.1 IC9.1 IC9.11
N$71: C21.2 IC9.9 IC9.12
N$72: 69.1 81.2 IC9.13
N$73: 60.1 61.2 IC7.14 TRIANGLE1.1
N$74: 61.1 64.1 D7.A D8.C IC7.10
N$75: 62.1 63.2 IC7.9
N$76: 63.1 IC7.8 SINE1.1
N$77: 59.2 SYMMETRY1.1
N$78: 76.2 IC8.8 ST6.1
N$79: 89.1 90.2 IC11.12
N$80: 91.2 IC11.14
N$81: 91.1 T3.B
N$82: 92.1 95.1 T3.C
N$83: 93.1 94.1 IC11.5
N$84: 95.2 96.1 C39.1 IC11.6
N$85: 96.2 C39.2 IC11.7 PULSE2.1
N$86: 98.2 99.1 101.1 109.1 IC11.1 IC11.13 INV_SAW2.1
N$87: 97.2 98.1 CENTER2.1 IC11.2
N$88: 99.2 100.1 D9.C IC11.9
N$89: D9.A D10.C IC11.8
N$90: 100.2 102.2 D10.A
N$91: 101.2 102.1 103.1 104.2 IC12.13
N$92: 109.2 110.1 IC12.2
N$93: 110.2 117.1 IC12.1 SAW2.1
N$94: 115.2 C34.2 IC15.7 SUB_SQR_5.1
N$95: 116.2 C33.2 IC15.1 SUB_SQR_6.1
N$96: 111.2 112.2 115.1 C34.1 IC15.6
N$97: 113.2 114.2 116.1 C33.1 IC15.2
N$98: 117.2 118.2 119.2
N$99: 119.1 IC13.9 ST9.1
N$100: 120.1 121.1 122.2 123.1 C35.1 IC13.13
N$101: 123.2 129.1 C35.2 IC13.14 SUB_SAW_5.1
N$102: 126.2 IC13.7 ST12.1
N$103: 128.2 129.2 130.1
N$104: 128.1 IC13.6 ST11.1
N$105: 124.1 125.1 126.1 127.1 C36.1 IC13.2
N$106: 124.2 C36.2 IC13.1 SUB_SAW_6.1
N$107: 131.1 132.2 IC12.6
N$108: C38.2 IC14.2 IC14.5
N$109: 112.1 122.1 IC14.1 IC14.11
N$110: C37.2 IC14.9 IC14.12
N$111: 113.1 125.2 IC14.13
N$112: 104.1 105.2 IC12.14 TRIANGLE2.1
N$113: 105.1 108.1 D11.A D12.C IC12.10
N$114: 106.1 107.2 IC12.9
N$115: 107.1 IC12.8 SINE2.1
N$116: 103.2 SYMMETRY2.1
N$117: 120.2 IC13.8 ST10.1
N$118: 133.1 134.2 IC16.12
N$119: 135.2 IC16.14
N$120: 135.1 T4.B
N$121: 136.1 139.1 T4.C
N$122: 137.1 138.1 IC16.5
N$123: 139.2 140.1 C55.1 IC16.6
N$124: 140.2 C55.2 IC16.7 PULSE3.1
N$125: 142.2 143.1 145.1 153.1 IC16.1 IC16.13 INV_SAW3.1
N$126: 141.2 142.1 CENTER3.1 IC16.2
N$127: 143.2 144.1 D13.C IC16.9
N$128: D13.A D14.C IC16.8
N$129: 144.2 146.2 D14.A
N$130: 145.2 146.1 147.1 148.2 IC17.13
N$131: 153.2 154.1 IC17.2
N$132: 154.2 161.1 IC17.1 SAW3.1
N$133: 159.2 C50.2 IC20.7 SUB_SQR_7.1
N$134: 160.2 C49.2 IC20.1 SUB_SQR_8.1
N$135: 155.2 156.2 159.1 C50.1 IC20.6
N$136: 157.2 158.2 160.1 C49.1 IC20.2
N$137: 161.2 162.2 163.2
N$138: 163.1 IC18.9 ST13.1
N$139: 164.1 165.1 166.2 167.1 C51.1 IC18.13
N$140: 167.2 173.1 C51.2 IC18.14 SUB_SAW_7.1
N$141: 170.2 IC18.7 ST16.1
N$142: 172.2 173.2 174.1
N$143: 172.1 IC18.6 ST15.1
N$144: 168.1 169.1 170.1 171.1 C52.1 IC18.2
N$145: 168.2 C52.2 IC18.1 SUB_SAW_8.1
N$146: 175.1 176.2 IC17.6
N$147: C54.2 IC19.2 IC19.5
N$148: 156.1 166.1 IC19.1 IC19.11
N$149: C53.2 IC19.9 IC19.12
N$150: 157.1 169.2 IC19.13
N$151: 148.1 149.2 IC17.14 TRIANGLE3.1
N$152: 149.1 152.1 D15.A D16.C IC17.10
N$153: 150.1 151.2 IC17.9
N$154: 151.1 IC17.8 SINE3.1
N$155: 147.2 SYMMETRY3.1
N$156: 164.2 IC18.8 ST14.1
N$157: 178.1 179.2 IC21.2 LEVEL1.1
N$158: 181.2 182.1 IC21.13
N$159: 189.2 190.1 IC21.9
N$160: 185.2 C68.2
N$161: 186.2 C69.2
N$162: 187.2 C70.2
N$163: 177.1 C65.1 NOISE_IN.1
N$164: 180.1 C65.2 IC21.3
N$165: 179.1 C66.1 IC21.1 LEVEL2.1
N$166: 183.2 C66.2 IC21.12
N$167: 182.2 C67.1 IC21.14 WHITE_OUT.1
N$168: 184.1 185.1 186.1 187.1 188.1 C71.2 IC21.10
N$169: 184.2 C67.2
N$170: 190.2 191.1 IC21.8 PINK_OUT.1
N$171: 191.2 192.1 193.1 C72.2
N$172: 193.2 C73.2 IC21.6
N$173: 192.2 C73.1 IC21.7 RED_OUT.1
PW_CV: 1.2 PW_CV.1
PW_CV1: 9.2 PW_CV1.1
PW_CV2: 89.2 PW_CV2.1
PW_CV3: 133.2 PW_CV3.1
SQR: DCO_TIMER.1 IC5.3
SQR1: DCO_TIMER1.1 IC9.3
SQR2: DCO_TIMER2.1 IC14.3
SQR3: DCO_TIMER3.1 IC19.3

## Tracks (layer width: path | path; a pad name or v marks a point on that pad's centre or on a via)
+5V  (via drill 0.33)
  Top 0.406: v60.33,15.56 55.88,15.56 53.98,17.46 IC5.14 | C8.2 v61.59,6.99
  Bottom 0.406: +5V.1 60.96,6.99 | 60.96,6.99 60.96,14.92 v60.33,15.56 | v61.59,6.99 60.96,6.99
+5V1  (via drill 0.33)
  Top 0.406: v60.33,45.78 55.88,45.78 53.98,47.69 IC9.14 | C32.2 v61.59,37.21
  Bottom 0.406: +5V1.1 60.96,37.21 | 60.96,37.21 60.96,45.15 v60.33,45.78 | v61.59,37.21 60.96,37.21
+5V2  (via drill 0.33)
  Top 0.406: v60.33,76.01 55.88,76.01 53.98,77.92 IC14.14 | C48.2 v61.59,67.44
  Bottom 0.406: +5V2.1 60.96,67.44 | 60.96,67.44 60.96,75.37 v60.33,76.01 | v61.59,67.44 60.96,67.44
+5V3  (via drill 0.33)
  Top 0.406: v81.09,3.17 81.09,7.62 83,9.53 IC19.14 | C64.2 v72.52,1.91
  Bottom 0.406: +5V3.1 72.52,2.54 | 72.52,2.54 80.45,2.54 v81.09,3.17 | v72.52,1.91 72.52,2.54
+15V  (via drill 0.33)
  Top 0.406: IC1.4 8.89,14.92 9.53,15.56 v16.19,15.56 16.51,15.24 23.5,15.24 | 23.5,15.24 v28.57,15.24 41.27,15.24 | 41.27,15.24 v45.72,15.24 v49.53,15.24 52.07,15.24 52.7,14.61 v52.7,13.65 | IC2.4 23.5,15.24 | IC3.4 41.27,15.24 | IC4.8 v47.62,20.32
  Bottom 0.406: +15V.1 50.8,9.21 52.7,11.11 v52.7,13.65 | v47.62,20.32 47.62,15.56 48.34,15.56 | 48.34,15.56 v49.53,15.24 | C11.2 15.88,15.24 v16.19,15.56 | v28.57,15.24 C10.2 | 45.09,15.56 C9.2 v45.72,15.24 | 48.34,15.56 C16.2
+15V1  (via drill 0.33)
  Top 0.406: IC6.4 8.89,45.15 9.53,45.78 v16.19,45.78 16.51,45.47 23.5,45.47 | 23.5,45.47 v28.57,45.47 41.27,45.47 | 41.27,45.47 v45.72,45.47 v49.53,45.47 52.07,45.47 52.7,44.83 v52.7,43.88 | IC7.4 23.5,45.47 | IC8.4 41.27,45.47 | IC10.8 v47.62,50.55
  Bottom 0.406: +15V1.1 50.8,39.43 52.7,41.34 v52.7,43.88 | v47.62,50.55 47.62,45.78 48.34,45.78 | 48.34,45.78 v49.53,45.47 | C27.2 15.88,45.47 v16.19,45.78 | v28.57,45.47 C26.2 | 45.09,45.78 C25.2 v45.72,45.47 | 48.34,45.78 C24.2
+15V2  (via drill 0.33)
  Top 0.406: IC11.4 8.89,75.37 9.53,76.01 v16.19,76.01 16.51,75.69 23.5,75.69 | 23.5,75.69 v28.57,75.69 41.27,75.69 | 41.27,75.69 v45.72,75.69 v49.53,75.69 52.07,75.69 52.7,75.06 v52.7,74.11 | IC12.4 23.5,75.69 | IC13.4 41.27,75.69 | IC15.8 v47.62,80.77
  Bottom 0.406: +15V2.1 50.8,69.66 52.7,71.56 v52.7,74.11 | v47.62,80.77 47.62,76.01 48.34,76.01 | 48.34,76.01 v49.53,75.69 | C43.2 15.88,75.69 v16.19,76.01 | v28.57,75.69 C42.2 | 45.09,76.01 C41.2 v45.72,75.69 | 48.34,76.01 C40.2
+15V3  (via drill 0.33)
  Top 0.406: IC16.4 80.45,54.61 81.09,53.98 v81.09,47.31 80.77,46.99 80.77,40.01 | 80.77,40.01 v80.77,34.92 80.77,22.23 | 80.77,22.23 v80.77,17.78 v80.77,13.97 80.77,11.43 80.14,10.79 v79.18,10.79 | IC17.4 80.77,40.01 | IC18.4 80.77,22.23 | IC20.8 v85.85,15.88
  Bottom 0.406: +15V3.1 74.74,12.7 76.64,10.79 v79.18,10.79 | v85.85,15.88 81.09,15.88 81.09,15.16 | 81.09,15.16 v80.77,13.97 | C59.2 80.77,47.62 v81.09,47.31 | v80.77,34.92 C58.2 | 81.09,18.41 C57.2 v80.77,17.78 | 81.09,15.16 C56.2
+15V4  (via drill 0.33)
  Top 0.305: v80.77,78.55 80.14,79.18 75.06,79.18 IC21.4 75.06,74.74 74.42,74.11 v73.79,74.11 | 177.2 67.65,72.42 68.07,72.83 v68.07,73.47
  Bottom 0.305: v80.77,78.55 83.95,78.55 | 83.95,78.55 85.22,78.55 85.22,72.2 82.68,69.66 +15V4.1 | v68.07,73.47 68.71,74.11 v73.79,74.11 | C74.2 83.95,77.28 83.95,78.55
-2.5V  (via drill 0.33)
  Top 0.406: v29.21,16.19 40.96,16.19 41.27,15.88 44.13,15.88 44.45,16.19 v46.04,16.19 | 28.1 51.44,6.03 v49.85,6.03 | v51.44,25.4 25.1 | v27.3,12.06 IC2.7 27.3,14.29 29.84,14.29 47.2 | 39.2 v29.84,21.27 | IC2.5 v24.77,12.06
  Bottom 0.406: 30.48,16.19 30.48,20.64 v29.84,21.27 | v49.85,6.03 46.67,9.21 46.67,16.19 | v46.04,16.19 46.67,16.19 | 46.67,16.19 46.67,18.41 46.35,18.73 46.35,20.32 47.31,21.27 48.26,21.27 49.21,20.32 51.12,20.32 51.44,20.64 v51.44,25.4 | 30.48,16.19 30.48,14.61 27.94,12.06 v27.3,12.06 v24.77,12.06 | 30.48,16.19 v29.21,16.19
-2.5V1  (via drill 0.33)
  Top 0.406: v29.21,46.42 40.96,46.42 41.27,46.1 44.13,46.1 44.45,46.42 v46.04,46.42 | 70.1 51.44,36.26 v49.85,36.26 | v51.44,55.63 67.1 | v27.3,42.29 IC7.7 27.3,44.51 29.84,44.51 83.2 | 77.2 v29.84,51.5 | IC7.5 v24.77,42.29
  Bottom 0.406: 30.48,46.42 30.48,50.86 v29.84,51.5 | v49.85,36.26 46.67,39.43 46.67,46.42 | v46.04,46.42 46.67,46.42 | 46.67,46.42 46.67,48.64 46.35,48.96 46.35,50.55 47.31,51.5 48.26,51.5 49.21,50.55 51.12,50.55 51.44,50.86 v51.44,55.63 | 30.48,46.42 30.48,44.83 27.94,42.29 v27.3,42.29 v24.77,42.29 | 30.48,46.42 v29.21,46.42
-2.5V2  (via drill 0.33)
  Top 0.406: v29.21,76.64 40.96,76.64 41.27,76.33 44.13,76.33 44.45,76.64 v46.04,76.64 | 114.1 51.44,66.48 v49.85,66.48 | v51.44,85.85 111.1 | v27.3,72.52 IC12.7 27.3,74.74 29.84,74.74 127.2 | 121.2 v29.84,81.72 | IC12.5 v24.77,72.52
  Bottom 0.406: 30.48,76.64 30.48,81.09 v29.84,81.72 | v49.85,66.48 46.67,69.66 46.67,76.64 | v46.04,76.64 46.67,76.64 | 46.67,76.64 46.67,78.87 46.35,79.18 46.35,80.77 47.31,81.72 48.26,81.72 49.21,80.77 51.12,80.77 51.44,81.09 v51.44,85.85 | 30.48,76.64 30.48,75.06 27.94,72.52 v27.3,72.52 v24.77,72.52 | 30.48,76.64 v29.21,76.64
-2.5V3  (via drill 0.33)
  Top 0.406: v81.72,34.29 81.72,22.54 81.41,22.23 81.41,19.37 81.72,19.05 v81.72,17.46 | 158.1 71.56,12.06 v71.56,13.65 | v90.93,12.06 155.1 | v77.6,36.2 IC17.7 79.82,36.2 79.82,33.66 171.2 | 165.2 v86.81,33.66 | IC17.5 v77.6,38.73
  Bottom 0.406: 81.72,33.02 86.17,33.02 v86.81,33.66 | v71.56,13.65 74.74,16.83 81.72,16.83 | v81.72,17.46 81.72,16.83 | 81.72,16.83 83.95,16.83 84.26,17.14 85.85,17.14 86.81,16.19 86.81,15.24 85.85,14.29 85.85,12.38 86.17,12.06 v90.93,12.06 | 81.72,33.02 80.14,33.02 77.6,35.56 v77.6,36.2 v77.6,38.73 | 81.72,33.02 v81.72,34.29
-15V  (via drill 0.33)
  Top 0.406: IC1.11 8.89,17.14 9.53,16.51 14.29,16.51 14.61,16.83 v16.19,16.83 16.83,16.83 17.46,16.19 v23.5,16.19 | v23.5,16.19 27.62,16.19 v28.57,17.14 41.27,17.14 | 41.27,17.14 41.91,16.51 43.5,16.51 44.13,17.14 v45.72,17.14 46.35,17.14 47.31,16.19 v51.44,16.19 | IC3.11 41.27,17.14 | IC2.11 v23.5,16.19 | 56.1 27.3,9.84 26.04,9.84 v26.04,10.48 | IC4.4 v51.44,12.06
  Bottom 0.406: v26.04,10.48 24.77,10.48 24.77,10.79 23.81,11.75 23.81,15.88 v23.5,16.19 | -15V.1 53.34,9.84 53.98,10.48 53.98,14.29 52.7,15.56 | 52.7,15.56 51.44,15.56 v51.44,16.19 v51.44,12.06 | C15.1 15.88,17.14 v16.19,16.83 | v28.57,17.14 C14.1 | C13.1 v45.72,17.14 | 52.7,15.56 C12.1
-15V1  (via drill 0.33)
  Top 0.406: IC6.11 8.89,47.37 9.53,46.74 14.29,46.74 14.61,47.05 v16.19,47.05 16.83,47.05 17.46,46.42 v23.5,46.42 | v23.5,46.42 27.62,46.42 v28.57,47.37 41.27,47.37 | 41.27,47.37 41.91,46.74 43.5,46.74 44.13,47.37 v45.72,47.37 46.35,47.37 47.31,46.42 v51.44,46.42 | IC8.11 41.27,47.37 | IC7.11 v23.5,46.42 | 88.1 27.3,40.07 26.04,40.07 v26.04,40.7 | IC10.4 v51.44,42.29
  Bottom 0.406: v26.04,40.7 24.77,40.7 24.77,41.02 23.81,41.97 23.81,46.1 v23.5,46.42 | -15V1.1 53.34,40.07 53.98,40.7 53.98,44.51 52.7,45.78 | 52.7,45.78 51.44,45.78 v51.44,46.42 v51.44,42.29 | C31.1 15.88,47.37 v16.19,47.05 | v28.57,47.37 C30.1 | C29.1 v45.72,47.37 | 52.7,45.78 C28.1
-15V2  (via drill 0.33)
  Top 0.406: IC11.11 8.89,77.6 9.53,76.96 14.29,76.96 14.61,77.28 v16.19,77.28 16.83,77.28 17.46,76.64 v23.5,76.64 | v23.5,76.64 27.62,76.64 v28.57,77.6 41.27,77.6 | 41.27,77.6 41.91,76.96 43.5,76.96 44.13,77.6 v45.72,77.6 46.35,77.6 47.31,76.64 v51.44,76.64 | IC13.11 41.27,77.6 | IC12.11 v23.5,76.64 | 132.1 27.3,70.29 26.04,70.29 v26.04,70.93 | IC15.4 v51.44,72.52
  Bottom 0.406: v26.04,70.93 24.77,70.93 24.77,71.25 23.81,72.2 23.81,76.33 v23.5,76.64 | -15V2.1 53.34,70.29 53.98,70.93 53.98,74.74 52.7,76.01 | 52.7,76.01 51.44,76.01 v51.44,76.64 v51.44,72.52 | C47.1 15.88,77.6 v16.19,77.28 | v28.57,77.6 C46.1 | C45.1 v45.72,77.6 | 52.7,76.01 C44.1
-15V3  (via drill 0.33)
  Top 0.406: IC16.11 82.68,54.61 82.04,53.98 82.04,49.21 82.36,48.9 v82.36,47.31 82.36,46.67 81.72,46.04 v81.72,40.01 | v81.72,40.01 81.72,35.88 v82.68,34.92 82.68,22.23 | 82.68,22.23 82.04,21.59 82.04,20 82.68,19.37 v82.68,17.78 82.68,17.14 81.72,16.19 v81.72,12.06 | IC18.11 82.68,22.23 | IC17.11 v81.72,40.01 | 176.1 75.37,36.2 75.37,37.47 v76.01,37.47 | IC20.4 v77.6,12.06
  Bottom 0.406: v76.01,37.47 76.01,38.73 76.33,38.73 77.28,39.69 81.41,39.69 v81.72,40.01 | -15V3.1 75.37,10.16 76.01,9.53 79.82,9.53 81.09,10.79 | 81.09,10.79 81.09,12.06 v81.72,12.06 v77.6,12.06 | C63.1 82.68,47.62 v82.36,47.31 | v82.68,34.92 C62.1 | C61.1 v82.68,17.78 | 81.09,10.79 C60.1
-15V4  (via drill 0.33)
  Top 0.305: IC21.11 75.06,79.82 v80.77,79.82
  Bottom 0.305: v80.77,79.82 83.95,79.82 | 83.95,79.82 86.49,79.82 86.49,70.29 85.22,69.03 -15V4.1 | C75.1 83.95,81.09 83.95,79.82
AMP_CV  (via drill 0.33)
  Top 0.406: v9.53,6.67 5.2 9.95,7.94 12.06,7.94 4.2
  Bottom 0.406: v9.53,6.67 10.16,6.03 PULSE_AMP_CV.1
AMP_CV1  (via drill 0.33)
  Top 0.406: v9.53,36.89 33.2 9.95,38.16 12.06,38.16 32.2
  Bottom 0.406: v9.53,36.89 10.16,36.26 PULSE_AMP_CV1.1
AMP_CV2  (via drill 0.33)
  Top 0.406: v9.53,67.12 93.2 9.95,68.39 12.06,68.39 92.2
  Bottom 0.406: v9.53,67.12 10.16,66.48 PULSE_AMP_CV2.1
AMP_CV3  (via drill 0.33)
  Top 0.406: v72.2,53.98 137.2 73.47,53.55 73.47,51.44 136.2
  Bottom 0.406: v72.2,53.98 71.56,53.34 PULSE_AMP_CV3.1
DCO_IN  (via drill 0.33)
  Top 0.406: 10.1 4.45,6.67 v6.35,4.76
  Bottom 0.406: v6.35,4.76 7.62,3.49 DCO_IN.1
DCO_IN1  (via drill 0.33)
  Top 0.406: 51.1 4.45,36.89 v6.35,34.99
  Bottom 0.406: v6.35,34.99 7.62,33.72 DCO_IN1.1
DCO_IN2  (via drill 0.33)
  Top 0.406: 97.1 4.45,67.12 v6.35,65.22
  Bottom 0.406: v6.35,65.22 7.62,63.94 DCO_IN2.1
DCO_IN3  (via drill 0.33)
  Top 0.406: 141.1 72.2,59.05 v70.29,57.15
  Bottom 0.406: v70.29,57.15 69.03,55.88 DCO_IN3.1
GND  (via drill 0.33)
  Top 0.305: 61.59,13.65 IC5.7
  Top 0.406: IC3.12 v40.01,20.64 42.55,20.64 IC3.10 v42.55,17.46 | IC3.5 42.55,11.75 41.27,11.75 | IC3.3 v40.01,11.75 41.27,11.75 | C5.1 v61.59,20.32 IC5.8 61.59,13.65 60.33,13.65 IC5.6 | v52.7,21.59 51.44,20.32 IC4.5 | 41.27,11.75 50.2 | v22.23,20.32 IC2.12 v22.23,17.14 | IC2.3 22.23,11.11 v21.91,11.11 24.13,11.11 24.77,10.48 55.2 | IC5.10 v59.05,20.32 | IC4.3 v50.16,12.06 | 29.21,24.45 26.99,24.45 D3.C v26.67,25.72 | 29.21,24.45 31.43,24.45 | D4.A 29.21,24.45 | 22.2 31.43,24.45 | 31.43,24.45 33.66,24.45 19.2 | IC5.4 57.78,12.38 v58.1,12.06 | 6.2 6.99,10.48 7.62,11.11 IC1.3 v7.62,12.38 | v10.16,20.32 IC1.10 v10.16,17.46 | 2.1 v4.45,25.72 | C6.1 59.05,9.53 59.37,9.84 61.17,9.84 | 61.17,9.84 C8.1 | 61.17,9.84 61.59,9.84 IC5.7 | 36.1 v48.9,25.4
  Bottom 0.406: v61.59,20.32 61.59,26.99 59.05,26.99 | 59.05,26.99 56.2,26.99 | 56.2,26.99 52.7,26.99 | 52.7,26.99 v52.7,21.59 52.7,18.73 | 40.01,26.99 v40.01,20.64 38.42,19.05 38.42,13.34 v40.01,11.75 | 40.01,26.99 48.9,26.99 | 48.9,26.99 52.7,26.99 | 26.67,26.99 40.01,26.99 | v21.91,11.11 20.32,12.7 20.32,18.41 v22.23,20.32 22.23,26.99 | 59.05,26.99 v59.05,20.32 58.1,20.32 v58.1,12.06 | GND.1 56.2,3.17 56.2,26.99 | v50.16,12.06 50.48,12.38 50.48,18.73 | v10.16,20.32 10.16,26.99 | 10.16,26.99 22.23,26.99 | 22.23,26.99 26.67,26.99 | 26.67,26.99 v26.67,25.72 | 10.16,26.99 4.45,26.99 v4.45,25.72 4.45,21.27 v1.59,18.41 1.59,13.97 | GND27.1 0.64,2.86 0.64,13.34 1.27,13.97 1.59,13.97 | 1.59,13.97 6.03,13.97 v7.62,12.38 | v10.16,17.46 10.48,17.14 C15.2 13.02,17.07 13.02,15.24 C11.1 | v22.23,17.14 C14.2 26.04,17.07 26.04,15.24 C10.1 | C9.1 43.18,15.32 43.18,17.14 C13.2 42.86,17.14 v42.55,17.46 | C16.1 48.9,18.73 50.48,18.73 | C12.2 52.7,18.73 | 52.7,18.73 50.48,18.73 | v48.9,25.4 48.9,26.99
  pour Top: 0,0 -0.06,25.08 3.17,28.26 63.5,28.26 63.5,16.83 56.52,16.83 56.2,17.14 56.2,21.59 53.98,21.59 52.07,20 52.07,17.14 53.34,15.88 53.34,12.06 56.52,8.89 56.39,0
  pour Bottom: 0,0 0,28.45 63.5,28.26 63.5,16.95 56.2,16.83 56.2,3.17 56.52,2.86 56.52,-0.06
GND1  (via drill 0.33)
  Top 0.305: 61.59,43.88 IC9.7
  Top 0.406: IC8.12 v40.01,50.86 42.55,50.86 IC8.10 v42.55,47.69 | IC8.5 42.55,41.97 41.27,41.97 | IC8.3 v40.01,41.97 41.27,41.97 | C21.1 v61.59,50.55 IC9.8 61.59,43.88 60.33,43.88 IC9.6 | v52.7,51.82 51.44,50.55 IC10.5 | 41.27,41.97 86.2 | v22.23,50.55 IC7.12 v22.23,47.37 | IC7.3 22.23,41.34 v21.91,41.34 24.13,41.34 24.77,40.7 87.2 | IC9.10 v59.05,50.55 | IC10.3 v50.16,42.29 | 29.21,54.67 26.99,54.67 D7.C v26.67,55.94 | 29.21,54.67 31.43,54.67 | D8.A 29.21,54.67 | 64.2 31.43,54.67 | 31.43,54.67 33.66,54.67 62.2 | IC9.4 57.78,42.61 v58.1,42.29 | 34.2 6.99,40.7 7.62,41.34 IC6.3 v7.62,42.61 | v10.16,50.55 IC6.10 v10.16,47.69 | 21.1 v4.45,55.94 | C22.1 59.05,39.75 59.37,40.07 61.17,40.07 | 61.17,40.07 C32.1 | 61.17,40.07 61.59,40.07 IC9.7 | 74.1 v48.9,55.63
  Bottom 0.406: v61.59,50.55 61.59,57.21 59.05,57.21 | 59.05,57.21 56.2,57.21 | 56.2,57.21 52.7,57.21 | 52.7,57.21 v52.7,51.82 52.7,48.96 | 40.01,57.21 v40.01,50.86 38.42,49.28 38.42,43.56 v40.01,41.97 | 40.01,57.21 48.9,57.21 | 48.9,57.21 52.7,57.21 | 26.67,57.21 40.01,57.21 | v21.91,41.34 20.32,42.93 20.32,48.64 v22.23,50.55 22.23,57.21 | 59.05,57.21 v59.05,50.55 58.1,50.55 v58.1,42.29 | GND1.1 56.2,33.4 56.2,57.21 | v50.16,42.29 50.48,42.61 50.48,48.96 | v10.16,50.55 10.16,57.21 | 10.16,57.21 22.23,57.21 | 22.23,57.21 26.67,57.21 | 26.67,57.21 v26.67,55.94 | 10.16,57.21 4.45,57.21 v4.45,55.94 4.45,51.5 v1.59,48.64 1.59,44.2 | GND2.1 0.64,33.08 0.64,43.56 1.27,44.2 1.59,44.2 | 1.59,44.2 6.03,44.2 v7.62,42.61 | v10.16,47.69 10.48,47.37 C31.2 13.02,47.29 13.02,45.47 C27.1 | v22.23,47.37 C30.2 26.04,47.29 26.04,45.47 C26.1 | C25.1 43.18,45.54 43.18,47.37 C29.2 42.86,47.37 v42.55,47.69 | C24.1 48.9,48.96 50.48,48.96 | C28.2 52.7,48.96 | 52.7,48.96 50.48,48.96 | v48.9,55.63 48.9,57.21
  pour Top: 0,30.23 -0.06,55.31 3.17,58.48 63.5,58.48 63.5,47.05 56.52,47.05 56.2,47.37 56.2,51.82 53.98,51.82 52.07,50.23 52.07,47.37 53.34,46.1 53.34,42.29 56.52,39.12 56.39,30.23
  pour Bottom: 0,30.23 0,58.67 63.5,58.48 63.5,47.18 56.2,47.05 56.2,33.4 56.52,33.08 56.52,30.16
GND2  (via drill 0.33)
  Top 0.305: 61.59,74.11 IC14.7
  Top 0.406: IC13.12 v40.01,81.09 42.55,81.09 IC13.10 v42.55,77.92 | IC13.5 42.55,72.2 41.27,72.2 | IC13.3 v40.01,72.2 41.27,72.2 | C37.1 v61.59,80.77 IC14.8 61.59,74.11 60.33,74.11 IC14.6 | v52.7,82.04 51.44,80.77 IC15.5 | 41.27,72.2 130.2 | v22.23,80.77 IC12.12 v22.23,77.6 | IC12.3 22.23,71.56 v21.91,71.56 24.13,71.56 24.77,70.93 131.2 | IC14.10 v59.05,80.77 | IC15.3 v50.16,72.52 | 29.21,84.9 26.99,84.9 D11.C v26.67,86.17 | 29.21,84.9 31.43,84.9 | D12.A 29.21,84.9 | 108.2 31.43,84.9 | 31.43,84.9 33.66,84.9 106.2 | IC14.4 57.78,72.83 v58.1,72.52 | 94.2 6.99,70.93 7.62,71.56 IC11.3 v7.62,72.83 | v10.16,80.77 IC11.10 v10.16,77.92 | 90.1 v4.45,86.17 | C38.1 59.05,69.98 59.37,70.29 61.17,70.29 | 61.17,70.29 C48.1 | 61.17,70.29 61.59,70.29 IC14.7 | 118.1 v48.9,85.85
  Bottom 0.406: v61.59,80.77 61.59,87.44 59.05,87.44 | 59.05,87.44 56.2,87.44 | 56.2,87.44 52.7,87.44 | 52.7,87.44 v52.7,82.04 52.7,79.18 | 40.01,87.44 v40.01,81.09 38.42,79.5 38.42,73.79 v40.01,72.2 | 40.01,87.44 48.9,87.44 | 48.9,87.44 52.7,87.44 | 26.67,87.44 40.01,87.44 | v21.91,71.56 20.32,73.15 20.32,78.87 v22.23,80.77 22.23,87.44 | 59.05,87.44 v59.05,80.77 58.1,80.77 v58.1,72.52 | GND3.1 56.2,63.63 56.2,87.44 | v50.16,72.52 50.48,72.83 50.48,79.18 | v10.16,80.77 10.16,87.44 | 10.16,87.44 22.23,87.44 | 22.23,87.44 26.67,87.44 | 26.67,87.44 v26.67,86.17 | 10.16,87.44 4.45,87.44 v4.45,86.17 4.45,81.72 v1.59,78.87 1.59,74.42 | GND4.1 0.64,63.31 0.64,73.79 1.27,74.42 1.59,74.42 | 1.59,74.42 6.03,74.42 v7.62,72.83 | v10.16,77.92 10.48,77.6 C47.2 13.02,77.52 13.02,75.69 C43.1 | v22.23,77.6 C46.2 26.04,77.52 26.04,75.69 C42.1 | C41.1 43.18,75.77 43.18,77.6 C45.2 42.86,77.6 v42.55,77.92 | C40.1 48.9,79.18 50.48,79.18 | C44.2 52.7,79.18 | 52.7,79.18 50.48,79.18 | v48.9,85.85 48.9,87.44
  pour Top: 0,60.45 -0.06,85.53 3.17,88.71 63.5,88.71 63.5,77.28 56.52,77.28 56.2,77.6 56.2,82.04 53.98,82.04 52.07,80.45 52.07,77.6 53.34,76.33 53.34,72.52 56.52,69.34 56.39,60.45
  pour Bottom: 0,60.45 0,88.9 63.5,88.71 63.5,77.41 56.2,77.28 56.2,63.63 56.52,63.31 56.52,60.39
GND3  (via drill 0.33)
  Top 0.305: IC19.7 79.18,1.91
  Top 0.406: IC18.12 v86.17,23.5 86.17,20.95 IC18.10 v83,20.95 | IC18.5 77.28,20.95 77.28,22.23 | IC18.3 v77.28,23.5 77.28,22.23 | C53.1 v85.85,1.91 IC19.8 79.18,1.91 79.18,3.17 IC19.6 | v87.12,10.79 85.85,12.06 IC20.5 | 77.28,22.23 174.2 | v85.85,41.27 IC17.12 v82.68,41.27 | IC17.3 76.64,41.27 v76.64,41.59 76.64,39.37 76.01,38.73 175.2 | IC19.10 v85.85,4.45 | IC20.3 v77.6,13.34 | 89.98,34.29 89.98,36.51 D15.C v91.25,36.83 | 89.98,34.29 89.98,32.07 | D16.A 89.98,34.29 | 152.2 89.98,32.07 | 89.98,32.07 89.98,29.84 150.2 | IC19.4 77.92,5.71 v77.6,5.4 | 138.2 76.01,56.52 76.64,55.88 IC16.3 v77.92,55.88 | v85.85,53.34 IC16.10 v83,53.34 | 134.1 v91.25,59.05 | C54.1 75.06,4.45 75.37,4.13 75.37,2.33 | 75.37,2.33 C64.1 | 75.37,2.33 75.37,1.91 IC19.7 | 162.1 v90.93,14.61
  Bottom 0.406: v85.85,1.91 92.52,1.91 92.52,4.45 | 92.52,4.45 92.52,7.3 | 92.52,7.3 92.52,10.79 | 92.52,10.79 v87.12,10.79 84.26,10.79 | 92.52,23.5 v86.17,23.5 84.58,25.08 78.87,25.08 v77.28,23.5 | 92.52,23.5 92.52,14.61 | 92.52,14.61 92.52,10.79 | 92.52,36.83 92.52,23.5 | v76.64,41.59 78.23,43.18 83.95,43.18 v85.85,41.27 92.52,41.27 | 92.52,4.45 v85.85,4.45 85.85,5.4 v77.6,5.4 | GND5.1 68.71,7.3 92.52,7.3 | v77.6,13.34 77.92,13.02 84.26,13.02 | v85.85,53.34 92.52,53.34 | 92.52,53.34 92.52,41.27 | 92.52,41.27 92.52,36.83 | 92.52,36.83 v91.25,36.83 | 92.52,53.34 92.52,59.05 v91.25,59.05 86.81,59.05 v83.95,61.91 79.5,61.91 | GND6.1 68.39,62.87 78.87,62.87 79.5,62.23 79.5,61.91 | 79.5,61.91 79.5,57.47 v77.92,55.88 | v83,53.34 82.68,53.02 C63.2 82.6,50.48 80.77,50.48 C59.1 | v82.68,41.27 C62.2 82.6,37.47 80.77,37.47 C58.1 | C57.1 80.85,20.32 82.68,20.32 C61.2 82.68,20.64 v83,20.95 | C56.1 84.26,14.61 84.26,13.02 | C60.2 84.26,10.79 | 84.26,10.79 84.26,13.02 | v90.93,14.61 92.52,14.61
  pour Top: 65.53,63.5 90.61,63.56 93.79,60.33 93.79,0 82.36,0 82.36,6.99 82.68,7.3 87.12,7.3 87.12,9.53 85.53,11.43 82.68,11.43 81.41,10.16 77.6,10.16 74.42,6.99 65.53,7.11
  pour Bottom: 65.53,63.5 93.98,63.5 93.79,0 82.49,0 82.36,7.3 68.71,7.3 68.39,6.99 65.47,6.99
GND4  (via drill 0.33)
  Top 0.305: 178.2 75.06,73.47 76.33,74.74 v76.33,75.37 IC21.5 | v69.98,88.71 181.1 69.98,87.44 71.25,87.44 71.25,86.17 72.3,86.17 183.1 | 67.86,77.92 180.2 v67.44,79.18 | C68.1 87.76,75.37 | 85,75.37 C69.1 85.22,75.37 | 85.22,75.37 85,75.37 | 85,75.37 83.1,75.37 | 83.1,75.37 C70.1 82.68,75.37 83.1,75.37 | v85.22,88.71 85.22,88.08 | 188.2 85.22,88.08 | 85.22,88.08 87.34,88.08 C71.1 | v82.68,84.9 189.1 | 85.22,75.37 87.76,75.37 | 87.76,75.37 v87.76,73.47 C72.1
  Bottom 0.305: 69.98,89.34 76.33,89.34 | 76.33,89.34 v76.33,75.37 | v69.98,88.71 69.98,89.34 | 69.98,89.34 67.44,89.34 v67.44,79.18 | 76.33,89.34 82.68,89.34 | 82.68,89.34 v82.68,84.9 | 82.68,89.34 85.22,89.34 | GND7.1 v87.76,73.47 87.76,82.36 | 87.76,82.36 87.76,89.34 85.22,89.34 | 85.22,89.34 v85.22,88.71 | C74.1 79.5,77.28 79.5,81.09 C75.2 82.04,81.09 82.04,82.36 87.76,82.36
N$1
  Top 0.406: IC1.12 7.62,20.64 6.99,21.27 1.1 6.99,23.18 4.87,23.18 2.2
N$2
  Top 0.406: 3.2 1.91,22.86 5.08,19.68 IC1.14
N$3  (via drill 0.33)
  Top 0.406: v1.91,20.95 3.49,19.37 3.49,16.98 T1.B | v1.91,25.72 3.1
  Bottom 0.406: v1.91,20.95 v1.91,25.72
N$4  (via drill 0.33)
  Top 0.406: T1.C 2.54,13.65 v3.81,12.38 | v12.06,10.48 4.1 12.06,9.21 13.34,9.21 13.34,5.71 13.97,5.08 15.88,5.08 16.51,5.71 16.51,6.67 7.1
  Bottom 0.406: v3.81,12.38 5.71,10.48 v12.06,10.48
N$5
  Top 0.406: 6.1 6.99,7.94 8.26,7.94 8.26,9.21 9.53,9.21 5.1 9.53,10.48 10.16,11.11 IC1.5
N$6
  Top 0.406: IC1.6 11.43,12.06 11.75,11.75 14.61,11.75 14.61,11.96 C7.1 14.61,12.38 14.61,10.58 8.1 14.61,9.84 14.61,7.3 7.2
N$7  (via drill 0.33)
  Top 0.406: IC1.7 12.7,13.97 v13.97,13.97 16.51,13.97 16.51,12.7 C7.2 17.14,11.96 17.14,10.16 16.83,9.84 8.2
  Bottom 0.406: PULSE.1 17.78,6.35 15.88,8.26 15.88,12.06 v13.97,13.97
N$8
  Top 0.406: IC6.12 7.62,50.86 6.99,51.5 9.1 6.99,53.4 4.87,53.4 21.2
N$9  (via drill 0.33)
  Top 0.406: 11.2 1.91,10.79 3.49,10.79 5.08,12.38 IC1.1 5.08,14.92 6.35,16.19 | 6.35,16.19 IC1.13 | 14.1 15.24,18.73 | 15.24,18.73 15.24,19.68 16.51,19.68 16.51,20.85 12.1 | 15.24,18.73 15.24,18.41 v13.97,18.41 | v8.26,16.19 6.35,16.19 | 23.1 19.68,6.67 20,6.35 v20.32,6.35
  Bottom 0.406: v8.26,16.19 8.26,17.14 9.53,18.41 v13.97,18.41 17.14,18.41 17.14,9.21 v20.32,6.35 INV_SAW.1
N$10  (via drill 0.33)
  Top 0.406: IC1.2 6.35,12.38 4.45,10.48 10.2 4.45,9.21 3.17,9.21 3.17,7.94 1.91,7.94 11.1 1.91,6.67 v3.81,4.76
  Bottom 0.406: v3.81,4.76 5.08,3.49 CENTER.1
N$11
  Top 0.406: 13.1 9.53,21.91 10.16,21.27 11.43,21.27 | 11.43,21.27 IC1.9 | 14.61,21.27 15.24,21.27 15.03,21.06 12.2 | 14.61,21.27 11.43,21.27 | D1.C 14.61,21.27
N$12  (via drill 0.33)
  Top 0.406: v12.7,20.32 IC1.8 | 14.61,25.08 D1.A 14.61,24.45 v15.88,24.45 15.88,23.18 17.14,23.18 D2.C
  Bottom 0.406: v15.88,24.45 12.7,21.27 v12.7,20.32
N$13
  Top 0.406: 13.2 9.53,24.45 10.79,24.45 10.79,23.18 11.64,23.18 15.2 12.06,23.18 13.34,23.18 13.34,26.04 17.14,26.04 D2.A
N$14
  Top 0.406: 15.1 12.06,26.99 18.41,26.99 | 18.41,26.99 19.68,26.99 | 19.68,26.99 16.1 | 17.2 22.23,26.99 19.68,26.99 | 14.2 18.41,18.41 | 18.41,18.41 18.41,26.99 | IC2.13 20.95,17.46 20.64,17.14 18.73,17.14 18.41,17.46 18.41,18.41
N$15
  Top 0.406: 23.2 19.68,9.84 20.95,9.84 | 24.1 21.8,9.84 20.95,9.84 | 20.95,9.84 IC2.2
N$16  (via drill 0.33)
  Top 0.406: 24.2 22.23,6.35 | IC2.1 v19.68,11.75 19.05,11.75 18.1,10.79 18.1,6.35 19.37,5.08 20.95,5.08 22.23,6.35 | 35.1 v38.73,21.91 | v22.86,6.35 22.23,6.35
  Bottom 0.406: v19.68,11.75 19.68,10.48 20.32,9.84 23.18,9.84 23.18,11.11 21.27,13.02 21.27,17.78 27.94,24.45 36.2,24.45 v38.73,21.91 | v22.86,6.35 SAW.1
N$17  (via drill 0.33)
  Top 0.406: 29.2 56.2,24.45 54.08,24.45 C2.2 53.98,26.99 50.16,26.99 v50.16,26.04 | IC4.7 48.9,20.32 v50.16,21.59
  Bottom 0.406: 50.16,24.45 45.4,24.45 39.37,18.41 39.37,13.97 40.96,12.38 40.96,10.16 38.1,7.3 SUB_SQR_1.1 | v50.16,21.59 50.16,24.45 | v50.16,26.04 50.16,24.45
N$18  (via drill 0.33)
  Top 0.406: IC4.1 47.62,12.38 46.35,11.11 45.09,11.11 45.09,7.94 45.94,7.94 C1.2 | C1.2 46.35,5.4 v36.83,5.4 | C1.2 46.35,7.62 46.67,7.94 48.48,7.94 30.2
  Bottom 0.406: SUB_SQR_2.1 35.56,4.13 v36.83,5.4
N$19